# Altium PCB LineInjectorSimplePCB.PcbDoc
Units mm, origin at the board's own origin, x right, y up, seen from the top; angles counter-clockwise.
Board outline 87.5 x 58.5 mm, 2 copper layers (Top Layer, Bottom Layer); 42 components, 17 nets, 105 pads, 727 vias.
Unrouted connection lines stored in the file: 1.
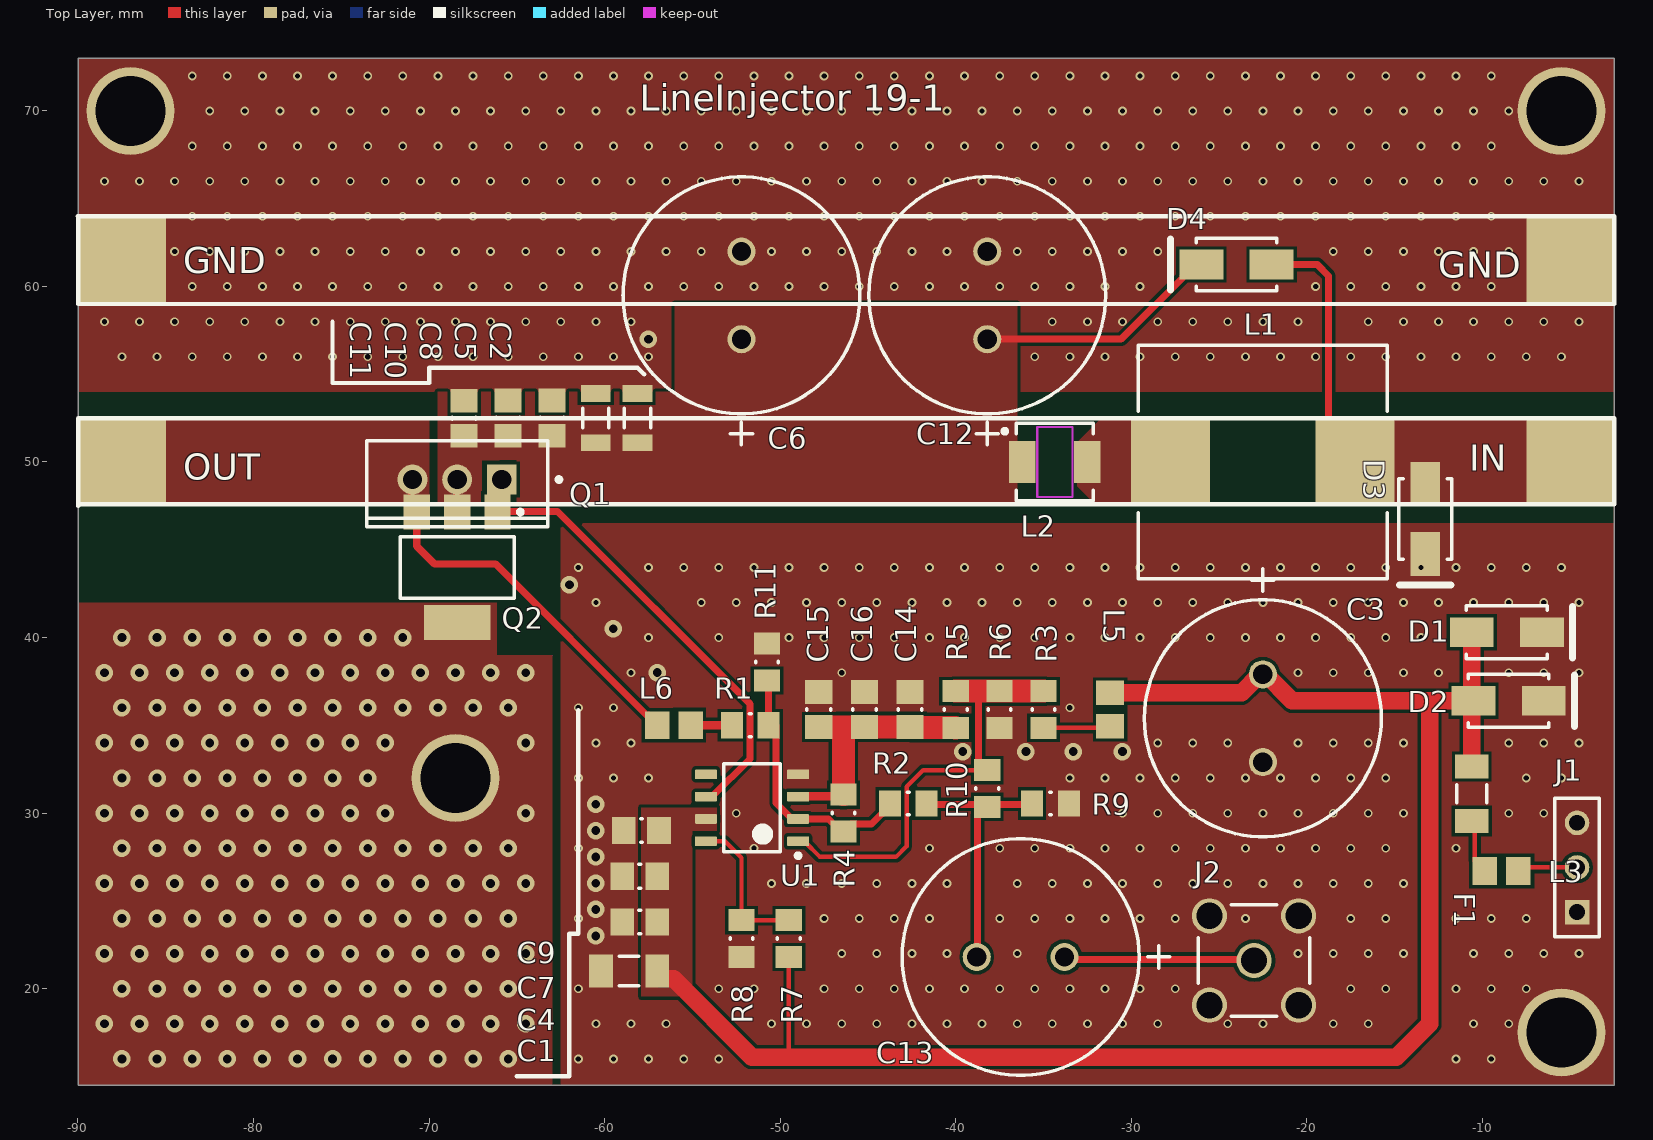
[diagram p0: Top Layer view]
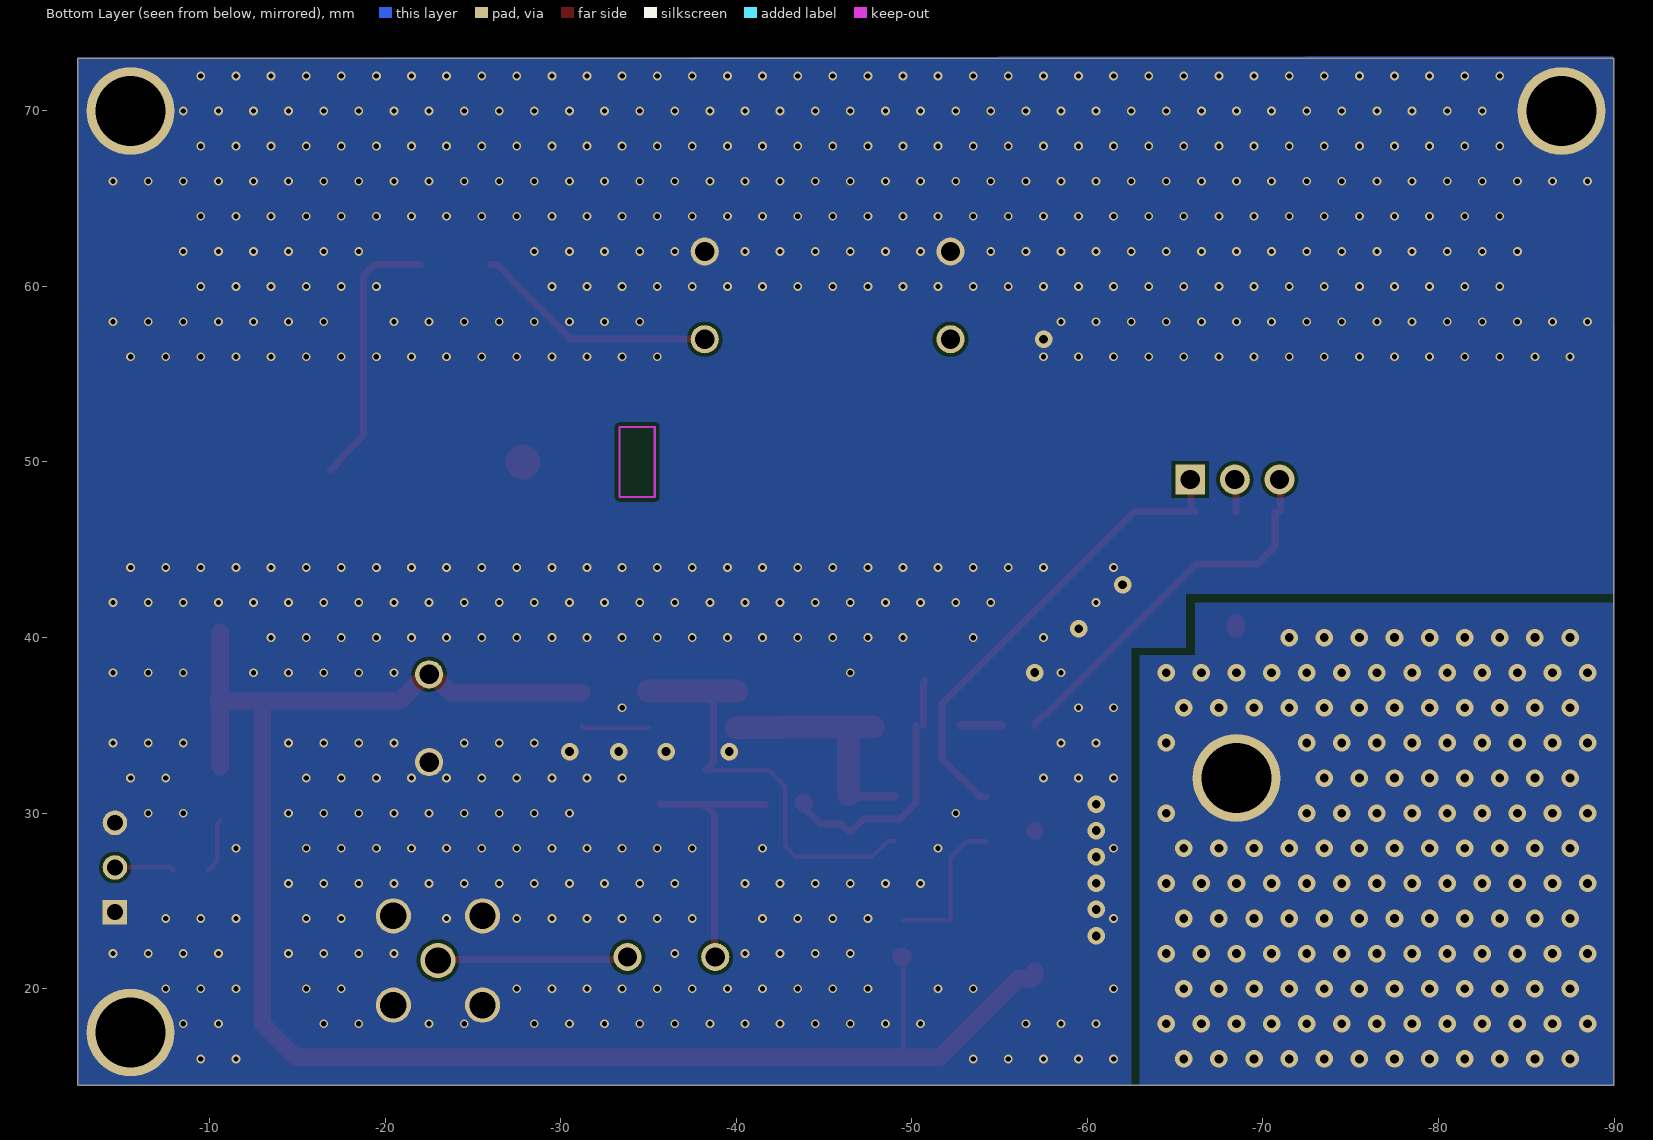
[diagram p1: Bottom Layer view, seen from below]

## Layer stack, top to bottom
Top Solder: solder mask 0.0102, Solder Resist, Dk 3.5
Top Layer: signal copper 0.0356
Dielectric 1: dielectric 0.32, FR-4, Dk 4.8
Bottom Layer: signal copper 0.0356
Bottom Solder: solder mask 0.0102, Solder Resist, Dk 3.5

## Board outline
-2.493,73 -2.493,39.993 -2.493,14.5 -89.993,14.5 -89.993,73

## Design rules (kind name [scope] priority, off if disabled: settings)
Clearance [All] p1: gap=0.2 ignorepadtopadclearanceinfootprint=FALSE
PlaneConnect [All] p1: planeconnectstyle=Direct reliefexpansion=0.508 reliefentries=4 reliefconductorwidth=0.254 reliefairgap=0.254
PolygonConnect [All] p1: connectstyle=Direct reliefconductorwidth=0.254 reliefentries=4 polygonreliefangle="90 Angle" airgapwidth=0.254
RoomDefinition linearInjector_main [InComponentClass('linearInjector_main')] p1: confinementstyle=ConfineIn formatcopy=TRUE lockcomponents=FALSE outline -1.494,13.743 7.256,13.743 7.256,24.243 -1.494,24.243
RoutingVias [All] p1: holewidth=0.4 width=0.7 viastyle="Through Hole" minholewidth=0.4 minwidth=0.7 maxholewidth=1 maxwidth=2
SolderMaskExpansion [All] p1: expansion=0.102
Width [All] p1: maxlimit=10 minlimit=0.254 preferedwidth=0.254
29 further rules are at their usual default settings.

## Components (designator, comment, footprint, x,y, rotation, side; value= is the part's Value field where it differs from the comment)
C1 "10uF" CAPC1206(3216)130_M -58.6,21 r180 top
C2 "10uF" CAPC1206(3216)130_L -58.125,52.5 r90 top
C3 "alum" PNSC-NF-A_V -22.5,35.4 r270 top
C4 "1uF" CAPC0805(2012)75_M -58,23.8 r0 top value=10nF
C5 "10uF" CAPC1206(3216)130_L -60.5,52.5 r90 top
C6 "alum" PNSC-NF-A_V -52.2,59.493 r90 top
C7 "100nF" CAPC0805(2012)75_M -58,26.4 r0 top value=10nF
C8 "1uF" CAPC0805(2012)75_M -62.993,52.5 r270 top value=10nF
C9 "10nF" CAPC0805(2012)75_M -57.9,29 r0 top
C10 "100nF" CAPC0805(2012)75_M -65.5,52.5 r270 top value=10nF
C11 "10nF" CAPC0805(2012)75_M -68,52.493 r270 top
C12 "alum" PNSC-NF-A_V -38.2,59.493 r90 top
C13 "alum" PNSC-NF-A_V -36.3,21.8 r180 top
C14 "10nF" CAPC0805(2012)75_M -42.6,35.9 r270 top
C15 "100nF" CAPC0805(2012)75_M -47.8,35.9 r270 top value=10nF
C16 "1uF" CAPC0805(2012)75_M -45.2,35.9 r270 top value=10nF
D1 "Zener" DIOD-B1X0-2_V -8.6,40.3 r0 top
D2 "B140-13-F" DIOD-B1X0-2_V -8.5,36.4 r0 top
D3 "B140-13-F" DIOD-B1X0-2_V -13.25,46.75 r270 top
D4 "B140-13-F" DIOD-B1X0-2_V -24,61.25 r180 top
F1 "PTC" RESC1206(3216)_M -10.6,31.1 r270 top value="499000.00 Ohm"
J1 "BCS-103-L-S-TE" SMTC-BCS-103-X-S-TE -4.6,24.36 r90 top
J2 "LTI-SASF54GT" LHT-LTI-SASF54GT_V -23,21.6 r0 top
L1 "7443550101" WE-HCI-1350 -22.5,50 r0 top
L2 "744373240010" "WE-LHMI 4020" -34.35,50 r0 top
L3 "0805" INDC2013X105X50ML20T30 -8.9,26.7 r0 top
L5 "0805" INDC2013X105X50ML20T30 -31.2,35.9 r90 top
L6 "0805" INDC2013X105X50ML20T30 -56.055,35 r180 top
Q1 "2SB1259" ONSC-TO-220-3-221A-09 -68.4,49 r270 top
Q2 "BSP19AT1" ONSC-SOT-223-4-318E-04_V -68.4,44 r270 top
R1 "1k" RESC0805(2012)_M -51.7,35 r180 top value="1780.00 Ohm"
R2 "1k" RESC0805(2012)_M -42.7,30.543 r180 top value="1780.00 Ohm"
R3 "1k" RESC0805(2012)_M -35,35.9 r270 top value="1780.00 Ohm"
R4 "open" RESC0805(2012)_M -46.393,30 r270 top value="1780.00 Ohm"
R5 "1k" RESC0805(2012)_M -40,35.9 r270 top value="1780.00 Ohm"
R6 "100R" RESC0805(2012)_M -37.5,35.9 r90 top value="1780.00 Ohm"
R7 "open" RESC0805(2012)_M -49.5,22.85 r270 top value="1780.00 Ohm"
R8 "1k" RESC0805(2012)_M -52.2,22.85 r90 top value="1780.00 Ohm"
R9 "49" RESC0805(2012)_M -34.6,30.543 r180 top value="1780.00 Ohm"
R10 "1k" RESC0805(2012)_M -38.2,31.4 r270 top value="1780.00 Ohm"
R11 "open" RESC0805(2012)_M -50.747,38.6 r270 top value="1780.00 Ohm"
U1 "THS3120ID" D0008A_L -51.6,30.3 r180 top

## Footprints (in the part's own frame and the unit in brackets; to place one, negate y for a bottom-side part, rotate by r counter-clockwise, add the part's x,y. Pads: shape width x height; smd on the part's side, far side on the other; paste and mask are expansions set on the pad)
CAPC0805(2012)75_M [mm] "Chip Capacitor, Body 2.0x1.2mm, Height 0.75mm, IPC Low Density"
  rect 1.35x1.55 smd: 1(-1,0) 2(1,0)
  silkscreen extent -0.05,-0.67 0.05,0.67, body extent -1.1,-0.72 1.1,0.72, height 0.75
CAPC1206(3216)130_L [mm] "Chip Capacitor, Body 3.2x1.6mm, Height 1.3mm, IPC High Density"
  rect 0.95x1.7 smd: 1(-1.4,0) 2(1.4,0)
  silkscreen extent -0.55,-0.75 0.55,0.75, body extent -1.7,-0.9 1.7,0.9, height 1.3
CAPC1206(3216)130_M [mm] "Chip Capacitor, Body 3.2x1.6mm, Height 1.3mm, IPC Low Density"
  rect 1.35x1.9 smd: 1(-1.6,0) 2(1.6,0)
  silkscreen extent -0.55,-0.85 0.55,0.85, body extent -1.7,-0.9 1.7,0.9, height 1.3
D0008A_L [mm] "SOIC, 8-Leads, Body 5x4mm, Pitch 1.27mm, IPC High Density"
  rrect18% 1.25x0.55 smd: 1(-2.625,1.905) 2(-2.625,0.635) 3(-2.625,-0.635) 4(-2.625,-1.905) 5(2.625,-1.905) 6(2.625,-0.635) 7(2.625,0.635) 8(2.625,1.905)
  silkscreen extent -2.75,-2.5 1.6,2.85, body extent -3,-2.45 3,2.45, height 1.63
DIOD-B1X0-2_V [mm] "Molded Diode, 2-Leads, Body 4.6x2.92mm"
  rect 2.5x1.7 smd: 1(-2,0) 2(2,0)
  silkscreen extent -2.3,-1.5 3.75,1.5, body extent -2.3,-1.46 2.3,1.46, height 2.3
INDC2013X105X50ML20T30 [mm] "Chip Inductor, 2-Leads, Body 2.2x1.45mm, IPC Low Density"
  rect 1.39x1.59 smd: 1(-0.955,0) 2(0.955,0)
  body extent -1.1,-0.72 1.1,0.72, height 1.05
LHT-LTI-SASF54GT_V [mm] "THD, 5-Leads, Body 6.35x6.35mm, Pitch 2.54mm"
  round 2 hole 1.5: 1(0,0) 2(-2.54,2.54) 3(2.54,2.54) 4(-2.54,-2.54) 5(2.54,-2.54)
  silkscreen extent -3.17,-3.17 3.17,3.17, body extent -3.17,-3.17 3.18,3.18, height 9.5
ONSC-SOT-223-4-318E-04_V [mm] "SOT223, 4-Leads, Body 6.5x3.5mm, Pitch 2.3mm"
  rect 2x1.5 smd: 1(-3.15,2.3) 2(-3.15,0) 3(-3.15,-2.3)
  rect 2x3.8 smd: 4(3.15,0)
  silkscreen extent -3.27,-3.25 1.75,3.73, body extent -1.75,-3.25 1.75,3.25, height 1.75
ONSC-TO-220-3-221A-09 [mm] "FM, 3-Leads, Body 10.3x4.85mm, Pitch 2.54mm"
  rect 1.7x1.7 hole 1.1: 1(0,2.54)
  round 1.7 hole 1.1: 2(0,0) 3(0,-2.54)
  silkscreen extent -2.2,-5.15 2.7,5.93, body extent -2.18,-5.15 2.67,5.15, height 19.85
PNSC-NF-A_V [mm] "THD, 2-Leads, Dia 13.5mm"
  round 1.6 hole 1.1: 1(-2.5,0) 2(2.5,0)
  silkscreen extent -8.51,-6.75 6.75,6.75, body extent -6.75,-6.75 6.75,6.75, height 11.5
RESC0805(2012)_M [mm] "Chip Resistor, Body 2.0x1.3mm, IPC Low Density"
  rect 1.25x1.5 smd: 1(-1.05,0) 2(1.05,0)
  silkscreen extent -0.05,-0.65 0.05,0.65, body extent -1.1,-0.67 1.1,0.67, height 0.7
RESC1206(3216)_M [mm] "Chip Resistor, Body 3.2x1.6mm, IPC Low Density"
  rect 1.35x1.9 smd: 1(-1.55,0) 2(1.55,0)
  silkscreen extent -0.5,-0.85 0.5,0.85, body extent -1.67,-0.87 1.67,0.87, height 0.75
SMTC-BCS-103-X-S-TE [mm] "Box Connector Socket Strip, 1x3 Pins, Vertical, 2.54mm Pitch, Female"
  rect 1.4x1.4 hole 0.89: 1(0,0)
  round 1.4 hole 0.89: 2(2.54,0) 3(5.08,0)
  silkscreen extent -1.4,-1.27 6.48,1.27, body extent -1.27,-1.27 6.35,1.27, height 7.37
WE-HCI-1350 [mm] "Inductor, 2-Leads, Body 13.0 x 12.8 mm"
  rect 4.5x5 smd: 1(-5.25,0) 2(5.25,0)
  silkscreen extent -7.1,-6.65 7.1,6.65, body extent -7,-6.4 7,6.4, height 4.99
"WE-LHMI 4020" [mm] "SMD Inductor, 2-Leads, Body 4.45 x 4.06mm"
  rect 1.5x2.4 smd: 1(-1.85,0) 2(1.85,0)
  Keep-Out Layer lines w0.127: -1,-2 -1,2 1,2 1,-2 -1,-2
  silkscreen extent -2.97,-2.2 2.2,2.2, body extent -2.22,-2.03 2.23,2.03, height 1.8

## Part data
C1 C2 C5: library part CMP-1037-04970-1, Case-EIA=1206, Case-Metric=3216, Rated Voltage="10 V", Tolerance="-20% to +80%", Max Thickness="1.3 mm", Technology=SMT
C3 C6 C12 C13: library part CMP-2000-06196-1, "5mm lead pitch", Capacitance=0.22F, Manufacturer=Panasonic, Maximum Operating Temperature=+70°C, Minimum Operating Temperature=-25°C, Package Description="2-Pin Through Hole Device, Dia 13.5 mm", Package Reference=NF-A, Tolerance=-20?+80%, Tolerance Minus=-20%, Tolerance Plus=+80%, Voltage=5.5Vdc, Datasheet URL=https://industrial.panasonic.com/cdbs/www-data/pdf/RDG0000/ABC0000C90.pdf, Datasheet Version=08/2016, Depth=7.5mm, Diameter=13.5mm, Dimensions=13.5(Dia.)x7.5mm, Height=7.5mm, Lead Diameter=0.8mm, Lead Pitch=5mm, Lifetime=1000h, Manufacturer URL=http://www.panasonic.com/, Mounting Technology=ThroughHole, Mounting Type=ThroughHole, Series=NF, Terminal Type=ThroughHole
C4 C7 C8 C9 C10 C11 C14 C15 C16: library part CMP-1036-03812-1, Case-EIA=0805, Case-Metric=2012, Rated Voltage="10 V", Tolerance="-20% to +80%", Max Thickness="0.75 mm", Technology=SMT
D1: library part CMP-2000-05096-1, "option", If - Forward Current=1A, Ifsm - Forward Surge Current=30A, Ir - Reverse Current=500uA, Manufacturer=DiodesIncorporated, Maximum Operating Temperature=+150C, Minimum Operating Temperature=-65C, Operating Temperature Range=-65Cto+150C, Package / Case=SMA, Package Description="2-Pin Surface Mount Device, Body 4.3 x 2.605 mm", Vf - Forward Voltage=0.5V, Vrrm - Repetitive Reverse Voltage=40V, Brand=DiodesIncorporated, Configuration=Single, Datasheet URL=http://www.diodes.com/_files/datasheets/ds13002.pdf, Datasheet Version="Rev. 18-2, 05/2013", Factory Pack Quantity=5000, Height=2.1mm, Length=4.6mm, Manufacturer URL=http://www.diodes.com/, Mounting Style=SMD/SMT, Package Reference=SMA, Packaging=Reel, Product=SchottkyDiodes, Product Category=SchottkyDiodes&Rectifiers, RoHS=True, Series=B140, Technology=Si, Termination Style=SMD/SMT, Type=SchottkyBarrierRectifier, Unit Weight=0.002258oz, Width=2.92mm
D2 D3 D4: library part CMP-2000-05096-1, "Surface Mount Schottky Barrier Rectifier, 1 A, -65 to 150 degC, 2-Pin SMA, RoHS, Tape and Reel", If - Forward Current=1A, Ifsm - Forward Surge Current=30A, Ir - Reverse Current=500uA, Manufacturer=DiodesIncorporated, Maximum Operating Temperature=+150C, Minimum Operating Temperature=-65C, Operating Temperature Range=-65Cto+150C, Package / Case=SMA, Package Description="2-Pin Surface Mount Device, Body 4.3 x 2.605 mm", Vf - Forward Voltage=0.5V, Vrrm - Repetitive Reverse Voltage=40V, Brand=DiodesIncorporated, Configuration=Single, Datasheet URL=http://www.diodes.com/_files/datasheets/ds13002.pdf, Datasheet Version="Rev. 18-2, 05/2013", Factory Pack Quantity=5000, Height=2.1mm, Length=4.6mm, Manufacturer URL=http://www.diodes.com/, Mounting Style=SMD/SMT, Package Reference=SMA, Packaging=Reel, Product=SchottkyDiodes, Product Category=SchottkyDiodes&Rectifiers, RoHS=True, Series=B140, Technology=Si, Termination Style=SMD/SMT, Type=SchottkyBarrierRectifier, Unit Weight=0.002258oz, Width=2.92mm
F1: library part CMP-1014-00815-1, "Fuse", Case-EIA=1206, Case-Metric=3216, Power="0.25 W", Tolerance="1 %", Technology=SMT
J1: library part CMP-1023-00005-1, "Tiger Claw(TM) Pass-Through Socket, Vertical, -55 to 125 degC, 2.54 mm Pitch, 3-Pin, Female, RoHS", Manufacturer=Samtec, Temperature Range="-55 to 125 degC", ComponentLink1Description="Manufacturer URL", ComponentLink1URL=http://www.samtec.com, ComponentLink2Description=Datasheet, ComponentLink2URL=http://www.samtec.com/documents/webfiles/pdf/BCS.PDF, ComponentLink3Description="Package Specification", ComponentLink3URL=http://www.samtec.com/documents/webfiles/cpdf/BCS-1XX-XXX-X-XX-XXX-MKT.pdf, DatasheetVersion=F-214, Mounting Technology=Through-hole, Orientation=Vertical, PackageDescription="Box Connector Socket Strip", PackageReference=BCS-103-X-S-TE, PackageVersion="BV, 9/1991", PartNumber=BCS-103-L-S-TE, Pitch="2.54 mm", RoHS=True
J2: library part CMP-1713-00001-1, "SMA Connector, Pitch 2.54 mm, 1 Position, Height 9.5 mm, Tail Length 4 mm, RoHS", Manufacturer="Lighthorse Technologies Inc.", ComponentLink1Description="Manufacturer URL", ComponentLink1URL=http://www.rfconnector.com, ComponentLink2Description=Datasheet, ComponentLink2URL=http://rfconnector.com/sheets/SASF54GT.pdf, DatasheetVersion="Rev. May-99", Mounting Technology="Through Hole", PackageDescription="SMA Connector, Pitch 2.54 mm, 1 Position, Height 9.5 mm, Tail Length 4 mm", PackageReference=LTI-SASF54GT, PartNumber=LTI-SASF54GT
L1: library part CMP-0226-00031-1, "SMD Flat Wire High Current Inductor WE-HCI, L=10.0 µH", Inductance="10.0 µH", ComponentLink1Description="Manufacturer Link", ComponentLink1URL=http://www.we-online.com, ComponentLink2Description=Datasheet, ComponentLink2URL=http://www.we-online.de/katalog/media/pdf/7443550101.pdf, DatasheetVersion="ver 1, Aug-2009", PackageDescription="Inductor, 2-Leads, Body 13.0 x 12.8 mm", PackageReference=WE-HCI-1350, PackageVersion=2008
L2: library part CMP-1353-00038-1, "SMD Power Inductor WE-LHMI, L=0.10 µH", Inductance="0.10 µH", Manufacturer="Wuerth Elektronik", ComponentLink1Description="Manufacturer URL", ComponentLink1URL=http://www.we-online.com, ComponentLink2Description=Datasheet, ComponentLink2URL=http://katalog.we-online.de/kataloge/eisos/media/pdf/744373240010.pdf, PackageReference="WE-LHMI 4020", PartNumber=744373240010
L3 L5 L6: library part CMP-1660-00003-1, Case Code (Metric)=2012, Current Rating="6 A", Max Operating Temperature="125 degC", Min Operating Temperature="-40 degC", Package Quantity=1, Resistance="4 mohm", Tolerance=30%, Case\Package=0805, Case Code (Imperial)=0805, ComponentLink1Description="Manufacturer URL", ComponentLink1URL=http://www.t-yuden.com/, ComponentLink2Description=Datasheet, ComponentLink2URL=http://ds.yuden.co.jp/TYCOMPAS/ut/detail.do?productNo=FBMJ2125HM210NT&fileName=FBMJ2125HM210NT_SS&mode=specSheetDownload, Core Material=Ferrite, DatasheetVersion=08/2016, Height="0.85 mm", Impedance="21 Ohm", Length="2 mm", Max Current Rating="6 A", Mount="Surface Mount", Mounting Technology="Surface Mount", PackageDescription="2-Pin Surface Mount Device, Body 2 x 1.25 mm", PackageReference=0805, Packaging="Tape and Reel", REACH SVHC=Unknown, RoHSCompliant=true, Width="1.25 mm"
Q1: library part CMP-1031-00034-1, Manufacturer="On Semiconductor", PartNumber=MJE5740G, ComponentLink1Description="Manufacturer URL", ComponentLink1URL=http://www.onsemi.com/, ComponentLink2Description=Datasheet, ComponentLink2URL=http://www.onsemi.com/pub_link/Collateral/MJE5740-D.PDF, ComponentLink3Description="Package Specification", ComponentLink3URL=http://www.onsemi.com/pub_link/Collateral/221A-09.PDF, DatasheetVersion="Rev. 11", IC Continuous (A)=8, Mounting Technology="Through Hole", PackageDescription="3-Pin Flange Mount, Vertical Straight Lead, Body 9.97 x 4.445 mm, Pitch 2.54 mm", PackageReference=TO-220-3-221A-09, PackageVersion="Rev. AG, 09/2011", Packing=Tube, Polarity=NPN, RoHS=TRUE
Q2: library part CMP-1048-00457-1, "NPN Silicon Expitaxial Transistor, 4-Pin SOT-223, Tape and Reel", Manufacturer="On Semiconductor", ComponentLink1Description="Manufacturer URL", ComponentLink1URL=http://www.onsemi.com/, ComponentLink2Description=Datasheet, ComponentLink2URL=http://www.onsemi.com/pub_link/Collateral/BSP19AT1-D.PDF, ComponentLink3Description="Package Specification", ComponentLink3URL=http://www.onsemi.com/pub_link/Collateral/318E-04.PDF, DatasheetVersion="Rev. 11", fT Min (MHz)=70, IC Continuous (A)=0.1, Mounting Technology="Surface Mount", PackageDescription="4-Pin Small Outline Transistor, Body 6.5 x 3.5 mm, Pitch 2.3 mm", PackageReference=SOT-223-4-318E-04, PackageVersion="Rev. N, 08/2009", Packing="Tape and Reel", PartNumber=BSP19AT1, Polarity=NPN, RoHS=FALSE
R1 R2 R3 R5 R6 R7 R8 R9 R10 R11: library part CMP-1013-00536-1, "1k 1%", Case-EIA=0805, Case-Metric=2012, Power="0.125 W", Tolerance="1 %", Technology=SMT
R4: library part CMP-1013-00536-1, Case-EIA=0805, Case-Metric=2012, Power="0.125 W", Tolerance="1 %", Technology=SMT
U1: library part CMP-0018-00123-2, "Single, Low Noise, High Output Drive, 475 mA Current-Feedback Amplifier with Power-Down, 10 to 30 V, -40 to 85 degC, 8-pin SOIC (D8), Green (RoHS & no Sb/Br)", Manufacturer="Texas Instruments", 2nd Harmonic(dBc)=51, 3rd Harmonic(dBc)=50, @ MHz=10, Acl, min stable gain(V/V)=1, BW @ Acl(MHz)=130, Code_JEDEC=MS-012, ComponentLink1Description="Manufacturer URL", ComponentLink1URL=http://www.ti.com/, ComponentLink2Description=Datasheet, ComponentLink2URL=http://www.ti.com/general/docs/lit/getliterature.tsp?genericPartNumber=THS3120&fileType=pdf, ComponentLink3Description="Package Specification", ComponentLink3URL=http://www.ti.com/litv/pdf/msoi002j, DatasheetVersion=SLOS420E, Diff Gain(%)=0.007, Diff Phase(deg)=0.018, Eco-Plan="Green (RoHS & no Sb/Br)", Iib(Max)(nA)=20000, Io(Typ)(mA)=475, Iq per channel(Max)(mA)=11, Mounting Technology="Surface Mount", Number of Channels=1, PackageDescription="8-Pin Plastic Small Outline, Body 4.9 x 3.9 mm, Pitch 1.27 mm", PackageReference=D0008A, PackageVersion="4040047-3/M, 06/2011", PartNumber=THS3120ID, Settling Time (0.1%)(Typ)(ns)=11, Slew Rate(Typ)(V/us)=1700, Sub Family="High Output Current Amplifier (>=50mA), High Speed Amplifier (>=50MHz), High Supply Voltage Amplifier (>=30V)", THD (Fc is 1 MHz)(Typ)(dB)=-78, Vio(Max)(mV)=8, Vn at Flatband(Typ)(nV/rtHz)=2.5, Vs(Max)(V)=30, Vs(Min)(V)=10

## Free pads (board coordinates)
  round 5 hole 4: 1(-68.493,31.993) 8(-87,70) 8(-5.493,17.5) 9(-5.493,70)
  rect 5x5 smd: 1(-4.993,49.993) 2(-4.993,61.493) 4(-87.493,61.493) 5(-87.493,49.993)

## Via types
v1: diameter 0.5, hole 0.3, Top Layer to Bottom Layer, tented both sides, 564 vias
v2: diameter 1, hole 0.5, Top Layer to Bottom Layer, tented both sides, 163 vias

## Nets (pads, with @x,y where several pads share a name; then routed paths per layer and width w, separated by ;. In a path a pad name is that pad's centre, name@x,y a point inside that pad or via, vN(x,y) a via of type N, cw(c..) or ccw(c..) an arc to the next point about the centre after c; other vN are vias at no path point)
GND: C1.2 C2.2 C3.2 C4.1 C5.2 C6.2 C7.1 C8.1 C9.1 C10.1 C11.1 C12.2 C14.1 C15.1 C16.1 D1.2 D2.2 D3.2 J1.1 J1.3 J2.2 J2.3 J2.4 J2.5 pad.2 pad.4 pad.8 pad.9 R6.1 R8.1 R9.1 R11.1 U1.4
  other v1: -61.493,15.993 -59.493,15.993 -57.493,15.993 -55.493,15.993 -53.493,15.993 -11.493,15.993 -9.493,15.993 -60.493,17.993 -58.493,17.993 -56.493,17.993 -50.493,17.993 -48.493,17.993 -46.493,17.993 -44.493,17.993 -42.493,17.993 -40.493,17.993 -38.493,17.993 -36.493,17.993 -34.493,17.993 -32.493,17.993 -30.493,17.993 -28.493,17.993 -24.493,17.993 -22.493,17.993 -18.493,17.993 -16.493,17.993 -10.493,17.993 -8.493,17.993 -61.493,19.993 -53.493,19.993 -51.493,19.993 -47.493,19.993 -45.493,19.993 -43.493,19.993 -41.493,19.993 -39.493,19.993 -37.493,19.993 -35.493,19.993 -33.493,19.993 -31.493,19.993 -29.493,19.993 -27.493,19.993 -17.493,19.993 -15.493,19.993 -11.493,19.993 -9.493,19.993 -7.493,19.993 -46.493,21.993 -44.493,21.993 -42.493,21.993 -40.493,21.993 -36.493,21.993 -20.493,21.993 -18.493,21.993 -16.493,21.993 -14.493,21.993 -10.493,21.993 -8.493,21.993 -6.493,21.993 -4.493,21.993 -61.493,23.993 -47.493,23.993 -45.493,23.993 -43.493,23.993 -41.493,23.993 -37.493,23.993 -35.493,23.993 -33.493,23.993 -31.493,23.993 -29.493,23.993 -27.493,23.993 -23.493,23.993 -17.493,23.993 -15.493,23.993 -11.493,23.993 -9.493,23.993 -7.493,23.993 -50.493,25.993 -48.493,25.993 -46.493,25.993 -44.493,25.993 -42.493,25.993 -40.493,25.993 -36.493,25.993 -34.493,25.993 -32.493,25.993 -30.493,25.993 -28.493,25.993 -26.493,25.993 -24.493,25.993 -22.493,25.993 -20.493,25.993 -18.493,25.993 -16.493,25.993 -14.493,25.993 -61.493,27.993 -51.493,27.993 -41.493,27.993 -37.493,27.993 -35.493,27.993 -33.493,27.993 -31.493,27.993 -29.493,27.993 -27.493,27.993 -25.493,27.993 -23.493,27.993 -21.493,27.993 -19.493,27.993 -17.493,27.993 -15.493,27.993 -11.493,27.993 -52.493,29.993 -30.493,29.993 -28.493,29.993 -26.493,29.993 -24.493,29.993 -22.493,29.993 -20.493,29.993 -18.493,29.993 -16.493,29.993 -14.493,29.993 -8.493,29.993 -6.493,29.993 -61.493,31.993 -59.493,31.993 -57.493,31.993 -33.493,31.993 -31.493,31.993 -29.493,31.993 -27.493,31.993 -25.493,31.993 -23.493,31.993 -21.493,31.993 -19.493,31.993 -17.493,31.993 -15.493,31.993 -7.493,31.993 -5.493,31.993 -60.493,33.993 -58.493,33.993 -28.493,33.993 -26.493,33.993 -24.493,33.993 -20.493,33.993 -18.493,33.993 -16.493,33.993 -14.493,33.993 -8.493,33.993 -6.493,33.993 -4.493,33.993 -61.493,35.993 -59.493,35.993 -33.493,35.993 -58.493,37.993 -46.493,37.993 -20.493,37.993 -18.493,37.993 -16.493,37.993 -14.493,37.993 -12.493,37.993 -8.493,37.993 -6.493,37.993 -4.493,37.993 -57.493,39.993 -53.493,39.993 -49.493,39.993 -47.493,39.993 -45.493,39.993 -43.493,39.993 -41.493,39.993 -39.493,39.993 -37.493,39.993 -35.493,39.993 -33.493,39.993 -31.493,39.993 -29.493,39.993 -27.493,39.993 -25.493,39.993 -23.493,39.993 -21.493,39.993 -19.493,39.993 -17.493,39.993 -15.493,39.993 -13.493,39.993 -60.493,41.993 -54.493,41.993 -52.493,41.993 -50.493,41.993 -48.493,41.993 -46.493,41.993 -44.493,41.993 -42.493,41.993 -40.493,41.993 -38.493,41.993 -36.493,41.993 -34.493,41.993 -32.493,41.993 -30.493,41.993 -28.493,41.993 -26.493,41.993 -24.493,41.993 -22.493,41.993 -20.493,41.993 -18.493,41.993 -16.493,41.993 -14.493,41.993 -12.493,41.993 -10.493,41.993 -8.493,41.993 -6.493,41.993 -4.493,41.993 -61.493,43.993 -57.493,43.993 -55.493,43.993 -53.493,43.993 -51.493,43.993 -49.493,43.993 -47.493,43.993 -45.493,43.993 -43.493,43.993 -41.493,43.993 -39.493,43.993 -37.493,43.993 -35.493,43.993 -33.493,43.993 -31.493,43.993 -29.493,43.993 -27.493,43.993 -25.493,43.993 -23.493,43.993 -21.493,43.993 -19.493,43.993 -17.493,43.993 -15.493,43.993 -13.493,43.993 -11.493,43.993 -9.493,43.993 -7.493,43.993 -5.493,43.993 -87.493,55.993 -85.493,55.993 -83.493,55.993 -81.493,55.993 -79.493,55.993 -77.493,55.993 -75.493,55.993 -73.493,55.993 -71.493,55.993 -69.493,55.993 -67.493,55.993 -65.493,55.993 -63.493,55.993 -61.493,55.993 -59.493,55.993 -57.493,55.993 -35.493,55.993 -33.493,55.993 -31.493,55.993 -29.493,55.993 -27.493,55.993 -25.493,55.993 -23.493,55.993 -21.493,55.993 -19.493,55.993 -17.493,55.993 -15.493,55.993 -13.493,55.993 -11.493,55.993 -9.493,55.993 -7.493,55.993 -5.493,55.993 -88.493,57.993 -86.493,57.993 -84.493,57.993 -82.493,57.993 -80.493,57.993 -78.493,57.993 -76.493,57.993 -74.493,57.993 -72.493,57.993 -70.493,57.993 -68.493,57.993 -66.493,57.993 -64.493,57.993 -62.493,57.993 -60.493,57.993 -58.493,57.993 -34.493,57.993 -32.493,57.993 -30.493,57.993 -28.493,57.993 -26.493,57.993 -24.493,57.993 -22.493,57.993 -20.493,57.993 -16.493,57.993 -14.493,57.993 -12.493,57.993 -10.493,57.993 -8.493,57.993 -6.493,57.993 -4.493,57.993 -83.493,59.993 -81.493,59.993 -79.493,59.993 -77.493,59.993 -75.493,59.993 -73.493,59.993 -71.493,59.993 -69.493,59.993 -67.493,59.993 -65.493,59.993 -63.493,59.993 -61.493,59.993 -59.493,59.993 -57.493,59.993 -55.493,59.993 -53.493,59.993 -51.493,59.993 -49.493,59.993 -47.493,59.993 -45.493,59.993 -43.493,59.993 -41.493,59.993 -39.493,59.993 -37.493,59.993 -35.493,59.993 -33.493,59.993 -31.493,59.993 -29.493,59.993 -19.493,59.993 -17.493,59.993 -15.493,59.993 -13.493,59.993 -11.493,59.993 -9.493,59.993 -84.493,61.993 -82.493,61.993 -80.493,61.993 -78.493,61.993 -76.493,61.993 -74.493,61.993 -72.493,61.993 -70.493,61.993 -68.493,61.993 -66.493,61.993 -64.493,61.993 -62.493,61.993 -60.493,61.993 -58.493,61.993 -56.493,61.993 -54.493,61.993 -50.493,61.993 -48.493,61.993 -46.493,61.993 -44.493,61.993 -42.493,61.993 -40.493,61.993 -36.493,61.993 -34.493,61.993 -32.493,61.993 -30.493,61.993 -28.493,61.993 -18.493,61.993 -16.493,61.993 -14.493,61.993 -12.493,61.993 -10.493,61.993 -8.493,61.993 -83.493,63.993 -81.493,63.993 -79.493,63.993 -77.493,63.993 -75.493,63.993 -73.493,63.993 -71.493,63.993 -69.493,63.993 -67.493,63.993 -65.493,63.993 -63.493,63.993 -61.493,63.993 -59.493,63.993 -57.493,63.993 -55.493,63.993 -53.493,63.993 -51.493,63.993 -49.493,63.993 -47.493,63.993 -45.493,63.993 -43.493,63.993 -41.493,63.993 -39.493,63.993 -37.493,63.993 -35.493,63.993 -33.493,63.993 -31.493,63.993 -29.493,63.993 -27.493,63.993 -25.493,63.993 -23.493,63.993 -21.493,63.993 -19.493,63.993 -17.493,63.993 -15.493,63.993 -13.493,63.993 -11.493,63.993 -9.493,63.993 -88.493,65.993 -86.493,65.993 -84.493,65.993 -82.493,65.993 -80.493,65.993 -78.493,65.993 -76.493,65.993 -74.493,65.993 -72.493,65.993 -70.493,65.993 -68.493,65.993 -66.493,65.993 -64.493,65.993 -62.493,65.993 -60.493,65.993 -58.493,65.993 -56.493,65.993 -54.493,65.993 -52.493,65.993 -50.493,65.993 -48.493,65.993 -46.493,65.993 -44.493,65.993 -42.493,65.993 -40.493,65.993 -38.493,65.993 -36.493,65.993 -34.493,65.993 -32.493,65.993 -30.493,65.993 -28.493,65.993 -26.493,65.993 -24.493,65.993 -22.493,65.993 -20.493,65.993 -18.493,65.993 -16.493,65.993 -14.493,65.993 -12.493,65.993 -10.493,65.993 -8.493,65.993 -6.493,65.993 -4.493,65.993 -83.493,67.993 -81.493,67.993 -79.493,67.993 -77.493,67.993 -75.493,67.993 -73.493,67.993 -71.493,67.993 -69.493,67.993 -67.493,67.993 -65.493,67.993 -63.493,67.993 -61.493,67.993 -59.493,67.993 -57.493,67.993 -55.493,67.993 -53.493,67.993 -51.493,67.993 -49.493,67.993 -47.493,67.993 -45.493,67.993 -43.493,67.993 -41.493,67.993 -39.493,67.993 -37.493,67.993 -35.493,67.993 -33.493,67.993 -31.493,67.993 -29.493,67.993 -27.493,67.993 -25.493,67.993 -23.493,67.993 -21.493,67.993 -19.493,67.993 -17.493,67.993 -15.493,67.993 -13.493,67.993 -11.493,67.993 -9.493,67.993 -82.493,69.993 -80.493,69.993 -78.493,69.993 -76.493,69.993 -74.493,69.993 -72.493,69.993 -70.493,69.993 -68.493,69.993 -66.493,69.993 -64.493,69.993 -62.493,69.993 -60.493,69.993 -58.493,69.993 -56.493,69.993 -54.493,69.993 -52.493,69.993 -50.493,69.993 -48.493,69.993 -46.493,69.993 -44.493,69.993 -42.493,69.993 -40.493,69.993 -38.493,69.993 -36.493,69.993 -34.493,69.993 -32.493,69.993 -30.493,69.993 -28.493,69.993 -26.493,69.993 -24.493,69.993 -22.493,69.993 -20.493,69.993 -18.493,69.993 -16.493,69.993 -14.493,69.993 -12.493,69.993 -10.493,69.993 -8.493,69.993 -83.493,71.993 -81.493,71.993 -79.493,71.993 -77.493,71.993 -75.493,71.993 -73.493,71.993 -71.493,71.993 -69.493,71.993 -67.493,71.993 -65.493,71.993 -63.493,71.993 -61.493,71.993 -59.493,71.993 -57.493,71.993 -55.493,71.993 -53.493,71.993 -51.493,71.993 -49.493,71.993 -47.493,71.993 -45.493,71.993 -43.493,71.993 -41.493,71.993 -39.493,71.993 -37.493,71.993 -35.493,71.993 -33.493,71.993 -31.493,71.993 -29.493,71.993 -27.493,71.993 -25.493,71.993 -23.493,71.993 -21.493,71.993 -19.493,71.993 -17.493,71.993 -15.493,71.993 -13.493,71.993 -11.493,71.993 -9.493,71.993
  other v2: -60.5,23 -60.5,24.509 -60.5,26 -60.5,27.5 -60.5,29 -60.5,30.5 -39.6,33.5 -36,33.5 -33.3,33.5 -30.5,33.5 -57,38 -59.5,40.5 -62,43 -57.5,56.993
NetC1_1: C1.1 C3.1 C4.2 C7.2 C9.2 D1.1 D2.1 F1.1 L5.2 R7.2 U1.7 | length 100.8
  Top Layer w0.254: R7.2 -49.5,16.3 -49.3,16.1
  Top Layer w0.4: C9.2@-56.993,28.993 C9.2@-56.993,29.093
  Top Layer w1: C1.1 -57,20.725 -56.825,20.55 -56.05,20.55 -51.6,16.1 -49.3,16.1 -14.9,16.1 -13,18 -13,36.4 ; R7.2 R7.2@-49.375,21.8 ; L5.2 -23.707,36.855 -22.662,37.9 C3.1 -22.338,37.9 -20.838,36.4 -13,36.4 ; F1.1 D2.1@-10.6,36.4 ; D1.1 D2.1@-10.6,36.4 ; D2.1 D2.1@-10.6,36.4 ; -13,36.4 D2.1@-10.6,36.4
NetC2_1: C2.1 C5.1 C6.1 C8.2 C10.2 C11.2 C12.1 D4.2 L2.1 pad.1@-68.493,31.993 Q1.2 Q2.2 Q2.4 | length 16.2
  Top Layer w0.4: Q2.2@-68.453,47.143 Q1.2@-68.453,48.993 ; C12.1 -30.574,56.993 -27.05,60.516 -27.05,60.6 -26.4,61.25 D4.2
  Top Layer w1: Q2.4@-68.453,40.493 Q2.4@-68.453,40.843
  other v2: -87.493,15.993 -85.493,15.993 -83.493,15.993 -81.493,15.993 -79.493,15.993 -77.493,15.993 -75.493,15.993 -73.493,15.993 -71.493,15.993 -69.493,15.993 -67.493,15.993 -65.493,15.993 -88.493,17.993 -86.493,17.993 -84.493,17.993 -82.493,17.993 -80.493,17.993 -78.493,17.993 -76.493,17.993 -74.493,17.993 -72.493,17.993 -70.493,17.993 -68.493,17.993 -66.493,17.993 -64.493,17.993 -87.493,19.993 -85.493,19.993 -83.493,19.993 -81.493,19.993 -79.493,19.993 -77.493,19.993 -75.493,19.993 -73.493,19.993 -71.493,19.993 -69.493,19.993 -67.493,19.993 -65.493,19.993 -88.493,21.993 -86.493,21.993 -84.493,21.993 -82.493,21.993 -80.493,21.993 -78.493,21.993 -76.493,21.993 -74.493,21.993 -72.493,21.993 -70.493,21.993 -68.493,21.993 -66.493,21.993 -64.493,21.993 -87.493,23.993 -85.493,23.993 -83.493,23.993 -81.493,23.993 -79.493,23.993 -77.493,23.993 -75.493,23.993 -73.493,23.993 -71.493,23.993 -69.493,23.993 -67.493,23.993 -65.493,23.993 -88.493,25.993 -86.493,25.993 -84.493,25.993 -82.493,25.993 -80.493,25.993 -78.493,25.993 -76.493,25.993 -74.493,25.993 -72.493,25.993 -70.493,25.993 -68.493,25.993 -66.493,25.993 -64.493,25.993 -87.493,27.993 -85.493,27.993 -83.493,27.993 -81.493,27.993 -79.493,27.993 -77.493,27.993 -75.493,27.993 -73.493,27.993 -71.493,27.993 -69.493,27.993 -67.493,27.993 -65.493,27.993 -88.493,29.993 -86.493,29.993 -84.493,29.993 -82.493,29.993 -80.493,29.993 -78.493,29.993 -76.493,29.993 -74.493,29.993 -72.493,29.993 -64.493,29.993 -87.493,31.993 -85.493,31.993 -83.493,31.993 -81.493,31.993 -79.493,31.993 -77.493,31.993 -75.493,31.993 -73.493,31.993 -88.493,33.993 -86.493,33.993 -84.493,33.993 -82.493,33.993 -80.493,33.993 -78.493,33.993 -76.493,33.993 -74.493,33.993 -72.493,33.993 -64.493,33.993 -87.493,35.993 -85.493,35.993 -83.493,35.993 -81.493,35.993 -79.493,35.993 -77.493,35.993 -75.493,35.993 -73.493,35.993 -71.493,35.993 -69.493,35.993 -67.493,35.993 -65.493,35.993 -88.493,37.993 -86.493,37.993 -84.493,37.993 -82.493,37.993 -80.493,37.993 -78.493,37.993 -76.493,37.993 -74.493,37.993 -72.493,37.993 -70.493,37.993 -68.493,37.993 -66.493,37.993 -64.493,37.993 -87.493,39.993 -85.493,39.993 -83.493,39.993 -81.493,39.993 -79.493,39.993 -77.493,39.993 -75.493,39.993 -73.493,39.993 -71.493,39.993
NetC13_1: C13.1 J2.1 | length 10.5
  Top Layer w0.4: C13.1 -33.65,21.65 -23.55,21.65 J2.1@-23.4,21.5
NetC13_2: C13.2 R2.1 R9.2 R10.2 | length 15.1
  Top Layer w0.254: R10.2 R10.2@-38.05,30.5
  Top Layer w0.4: R2.1@-41.65,30.5 -38.2,30.5 -38.05,30.5 -35.693,30.5 R9.2 ; C13.2 -38.75,21.85 -38.75,29.925 -38.325,30.35 R10.2
NetC14_2: C14.2 C15.2 C16.2 R4.1 R5.2 U1.3 | length 14.7
  Top Layer w0.4: R4.1@-46.636,31.193 -46.486,31.043 R4.1@-46.393,31.136
  Top Layer w0.5: U1.3 -48.95,30.96 -46.483,30.96 R4.1
  Top Layer w1.3: C15.2 -46.5,34.9 ; R4.1 -46.393,31.136 -46.393,34.793 -46.5,34.9 ; R5.2 -40.025,34.875 -42.575,34.875 C14.2 C16.2 -46.5,34.9
NetF1_2: F1.2 L3.1 | length 3.2
  Top Layer w0.254: F1.2 -10.423,29.373 -10.423,27.268 L3.1
NetJ1_2: J1.2 L3.2 | length 3.4
  Top Layer w0.254: L3.2 -7.745,26.9 J1.2
NetL1_1: L1.1 L2.2 | length 0
NetL5_1: L5.1 R3.2 | length 3.8
  Top Layer w0.254: R3.2 -31.295,34.85 L5.1
NetL6_1: L6.1 R1.2 | length 2.3
  Top Layer w0.5: L6.1 R1.2
NetQ1_1: Q1.1 Q2.1 U1.6 | length 30.5
  Top Layer w0.3: Q2.1 -63.011,47.15
  Top Layer w0.4: Q1.1@-65.913,48.993 -65.913,47.383 -66.123,47.173 -62.673,47.173 -51.725,36.225 -51.725,33.085 -53.875,30.935 U1.6
NetR1_1: R1.1 R2.2 R4.2 R11.2 U1.2 | length 15
  Top Layer w0.4: R11.2 -50.65,37.453 R1.1 ; R1.1@-50.225,35 -50.225,30.565 -49.325,29.665 U1.2 -47.233,29.665 -46.518,28.95 R4.2 -45.968,29.375 -44.793,29.375 -43.75,30.418 R2.2
  Top Layer w1: R2.2@-43.881,30.523 R2.2@-43.818,30.586
NetR3_1: R3.1 R5.1 R6.2 R10.1 U1.1 | length 24.9
  Top Layer w0.254: U1.1 -48.625,28.395 -47.73,27.5 -43.4,27.5 -42.798,28.102 -42.798,31.502 -41.85,32.45 -38.275,32.45 R10.1
  Top Layer w0.4: -38.7,36.95 -38.7,32.875 R10.1@-38.275,32.45
  Top Layer w1.3: R5.1 -38.7,36.95 R6.2 R3.1
NetR7_1: R7.1 R8.2 U1.8 | length 8.7
  Top Layer w0.254: U1.8 -53.145,28.395 -52.2,27.45 R8.2 R7.1
Power_Input: D3.1 D4.1 L1.2 pad.1@-4.993,49.993 | length 15.4
  Top Layer w0.4: D4.1 -19.4,61.25 -18.75,60.6 -18.75,51.5 L1.2 ; L1.2@-17.343,49.993 L1.2@-16.893,49.543
Power_Output: L6.2 pad.5 Q1.3 Q2.3 | length 21.7
  Top Layer w0.4: Q2.3@-70.993,47.193 Q1.3@-70.993,48.993 ; Q2.3 -70.7,45.2 -69.7,44.2 -66.21,44.2 -57.605,35.595 -57.505,35.595 -57.01,35.1 L6.2
pads on no net: U1.5

## Polygon pours and split planes (outlines as drawn)
GND on Top Layer "Top Layer-GND 1" (solid, remove dead copper, pour order 2): -2.493,73 -89.993,73 -89.993,53.993 -2.493,53.993
NetC1_1 on Top Layer (solid, remove dead copper, pour order 20): -53.6,30.3 -57.9,30.3 -57.9,19.55 -55,19.55 -55,28.95 -54.95,29 -53.6,29
GND on Top Layer "Top Layer-GND" (solid, remove dead copper, pour order 23): -2.5,46.5 -62.5,46.5 -62.5,14.5 -2.493,14.5 -2.493,30
NetC1_1 on Top Layer "Top Layer-NetC1_1" (solid, remove dead copper, pour order 18): -2.493,79.993
NetC2_1 on Top Layer "Top Layer-NetC2_1" (solid, remove dead copper, pour order 14): -66.153,41.993 -66.153,38.993 -62.993,38.993 -62.993,14.5 -89.993,14.5 -89.993,41.993
NetL1_1 on Top Layer "Top Layer-NetL1_1" (solid, remove dead copper, pour order 10): -28.75,52.5 -28.85,52.4 -28.85,47.5 -31.956,47.5 -33.155,48.699 -33.155,51.047 -31.702,52.5
NetC2_1 on Top Layer "Top Layer-NetC2_1 1" (solid, remove dead copper, pour order 0): -69.493,47.493 -69.493,53.993 -55.993,53.993 -55.993,59 -36.5,59 -36.5,47.493 -64.993,47.493 -64.993,50.12 -66.993,50.068 -66.993,47.493
Power_Output on Top Layer "Top Layer-Power_Output" (solid, remove dead copper, pour order 8): -89.993,52.493 -69.993,52.493 -69.993,47.493 -89.993,47.493
Power_Input on Top Layer "Top Layer-Power_Input" (solid, remove dead copper, pour order 6): -2.493,47.493 -2.493,52.493 -18.668,52.493 -18.668,47.493
no net on Top Layer "Top Layer-No Net" (solid, remove dead copper, pour order 4): -2.493,52.493
GND on Bottom Layer "Bottom Layer-GND" (solid, remove dead copper, pour order 22): -2.5,73 -2.5,30 -2.496,14.5 -62.5,14.5 -62.5,39.406 -65.594,39.406 -65.594,42.5 -90,42.5 -89.993,79.993 -4716.295,79.993
NetC2_1 on Bottom Layer "Bottom Layer-NetC2_1" (solid, remove dead copper, pour order 16): -89.993,41.993 -66.153,41.993 -66.153,38.993 -62.993,38.993 -62.993,14.5 -89.993,14.5

## Keep-outs
Top Layer:
  region: -62.993,38.993

## Silkscreen, mask and mechanical layers (free items; w line width, h text height)
Top Overlay:
  lines w0.254: -75.5,58 -75.5,54.5 -70,54.5 -70,55.375 -58.125,55.375 -57.75,55 ; -65,15 -62,15 -62,19.75 -62,23.125 -61.5,23.125 -61.5,35.85 ; -90,64 -89.993,63.993 -89.993,59 -2.493,59 -2.493,64 -90,64 ; -89.993,47.493 -89.893,47.593 -2.493,47.593 -2.493,52.493 -89.993,52.493 -89.993,48.698 -89.993,47.493
  text "LineInjector 19-1" at -58,70 h1.5
  text "GND" at -83.993,60.75 h1.5
  text "GND" at -12.5,60.5 h1.5
  text "IN" at -10.75,49.5 h1.5
  text "OUT" at -84,49 h1.5
Top Solder:
  rectangle: -73.5,23.993 -63.5,39
Bottom Solder:
  rectangle: -89.993,18 -64,38
Mechanical 2:
  lines w0.254: -2.5,20.014 -2.5,30 -2.5,73 -90,73 -90,14.5 -2.493,14.5 -2.493,15
Mechanical 3:
  lines w0.254: -2.493,19.993 -2.493,29.993 -2.493,42.493 ; -2.493,20 -2.493,14.5 -89.993,14.5 -89.993,73 -2.493,73 -2.493,41.263